# EAGLE board butterfly-fc (EAGLE 9.6.2)
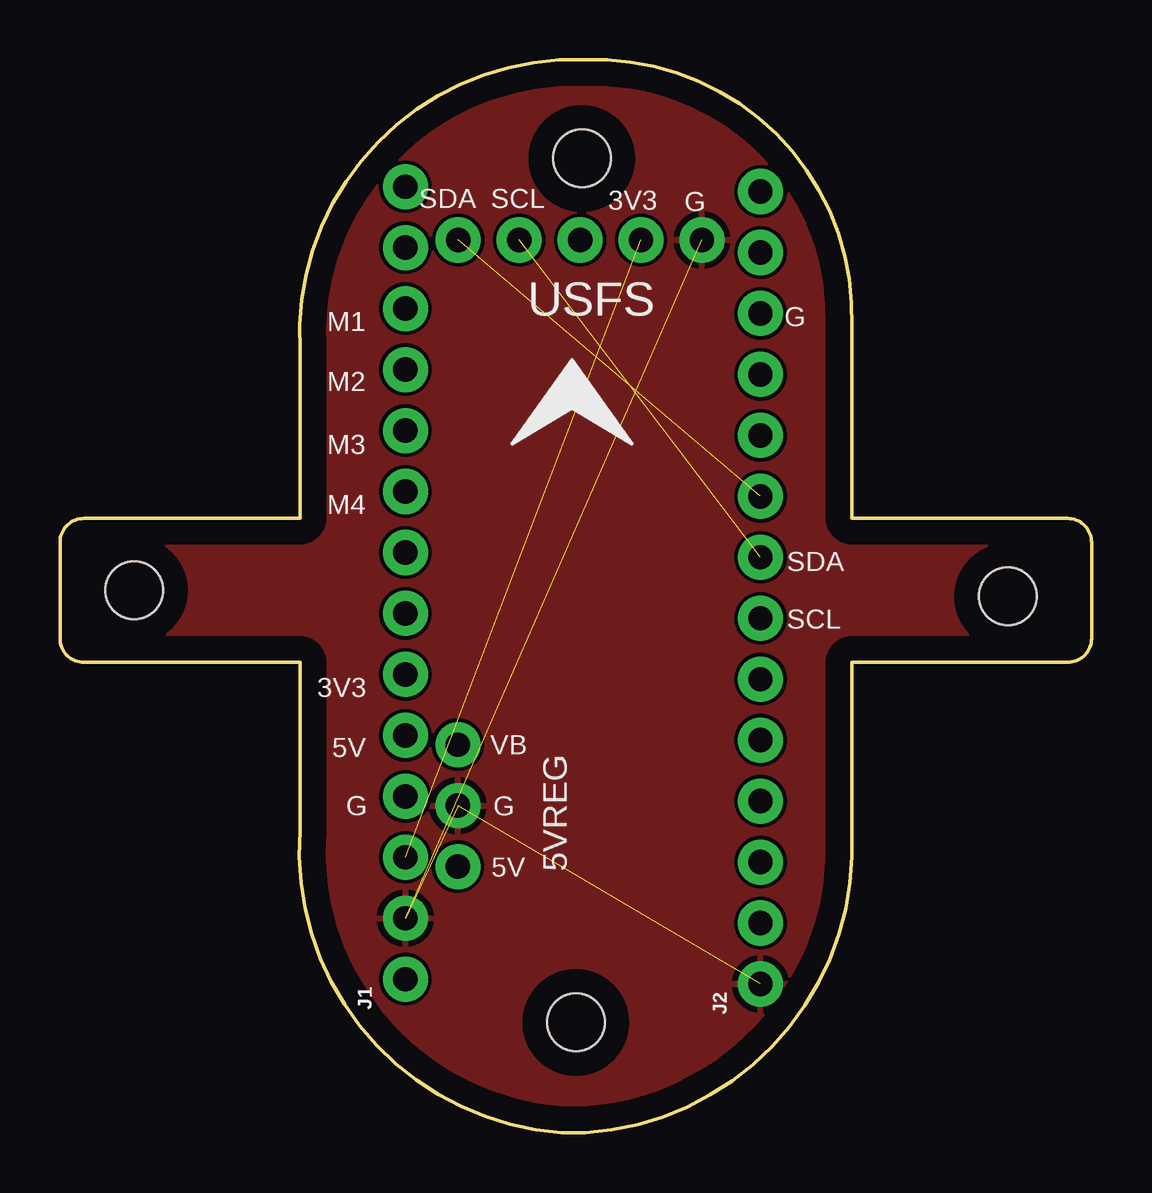
[diagram p0: board, top side]
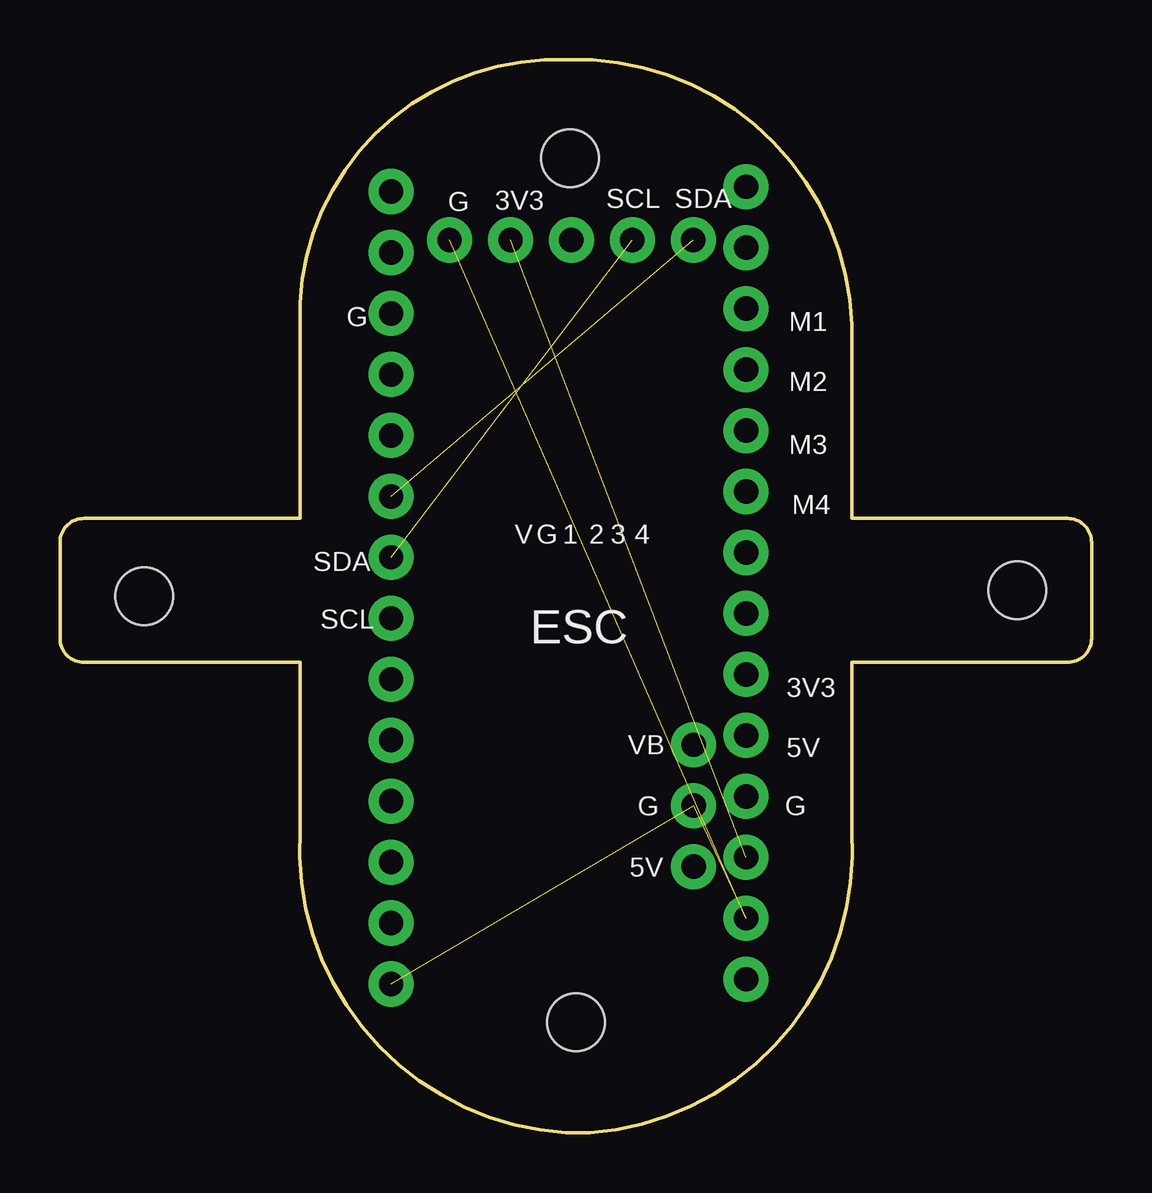
[diagram p1: board, bottom side, seen from below]

Size 43 x 44.7 mm. Coordinates in mm from the lower left corner, seen from the top.
Outline: 33,19.6 33,12.6 arc-90 21.9,0 20.9,0 arc-90 10,12.6 10,19.6 1,19.6 arc-90 0,20.6 0,24.6 arc-90 1,25.6 10,25.6 10,32.6 arc-90 20.8,44.7 22.8,44.7 arc-90 33,33.6 33,25.6 42,25.6 arc-90 43,24.6 43,20.6 arc-90 42,19.6 33,19.6
Copper layers (1*16): Top 0.035mm / dielectric 1.5mm / Bottom 0.035mm
Design rules "default": minimum track width 6mil, minimum drill 0.35mm, track to track 6mil, track to pad 6mil, pad to pad 6mil, via to via 6mil, smd to smd 6mil, copper to edge 40mil, drill to drill 6mil, minimum pad ring 10mil, minimum via ring 8mil, stop-mask expansion 4mil, vias tented up to drill 0mil, thermal gap 10mil
Holes 2.4 mm at 3.1,22.6 39.5,22.35 21.5,4.6 21.75,40.6

## Footprints (pad centres in the part's own frame; a part is rotated, then mirrored left to right if it is on the bottom)
1X03_NO_SILK = drill 1.016 pad 1.88: 1 0,0; 2 2.54,0; 3 5.08,0
1X14_NO_SILK = drill 1.016 pad 1.88: 1 0,0; 2 2.54,0; 3 5.08,0; 4 7.62,0; 5 10.16,0; 6 12.7,0; 7 15.24,0; 8 17.78,0; 9 20.32,0; 10 22.86,0; 11 25.4,0; 12 27.94,0; 13 30.48,0; 14 33.02,0
1X05_NO_SILK = drill 1.016 pad 1.88: 1 0,0; 2 2.54,0; 3 5.08,0; 4 7.62,0; 5 10.16,0

## Placement (x,y rotation side)
5VREG  [1X03_NO_SILK]  16.59,11.09 90 top
J1  [1X14_NO_SILK]  14.4,6.4 90 top
J2  [1X14_NO_SILK]  29.2,6.2 90 top
USFS  [1X05_NO_SILK]  16.6,37.2 0 top

## Library data of the parts
5VREG J1 J2 USFS = SparkFun-Connectors

## Nets
3V3: J1.3 USFS.4
5V: 5VREG.1
GND: 5VREG.2 J1.2 J2.1 USFS.5
SCL: J2.8 USFS.2
SDA: J2.9 USFS.1
VBAT: 5VREG.3
VIN: J1.1

## Tracks (layer width: path | path; a pad name or v marks a point on that pad's centre or on a via)
3V3  (1 unrouted)
GND  (3 unrouted)
  pour Top: 19,45.6 44,45.6 44,-0.4 44,-4.4 0,-4.4 0,45.6
SCL  (1 unrouted)
SDA  (1 unrouted)

## Text on the board
tPlace: USFS
bPlace: ESC | SCL
tNames: SDA | SCL | 3V3 | G | M1 | G | M2 | M3 | M4 | SDA | SCL | 3V3 | 5V | VB | 5VREG | G | G | 5V
bNames: SDA | SCL | 3V3 | G | M1 | G | M2 | M3 | M4 | 4 | 3 | 2 | 1 | G | V | SDA | 3V3 | 5V | VB | G | G | 5V